# EAGLE board raspi_reprap (EAGLE 6.5.0)
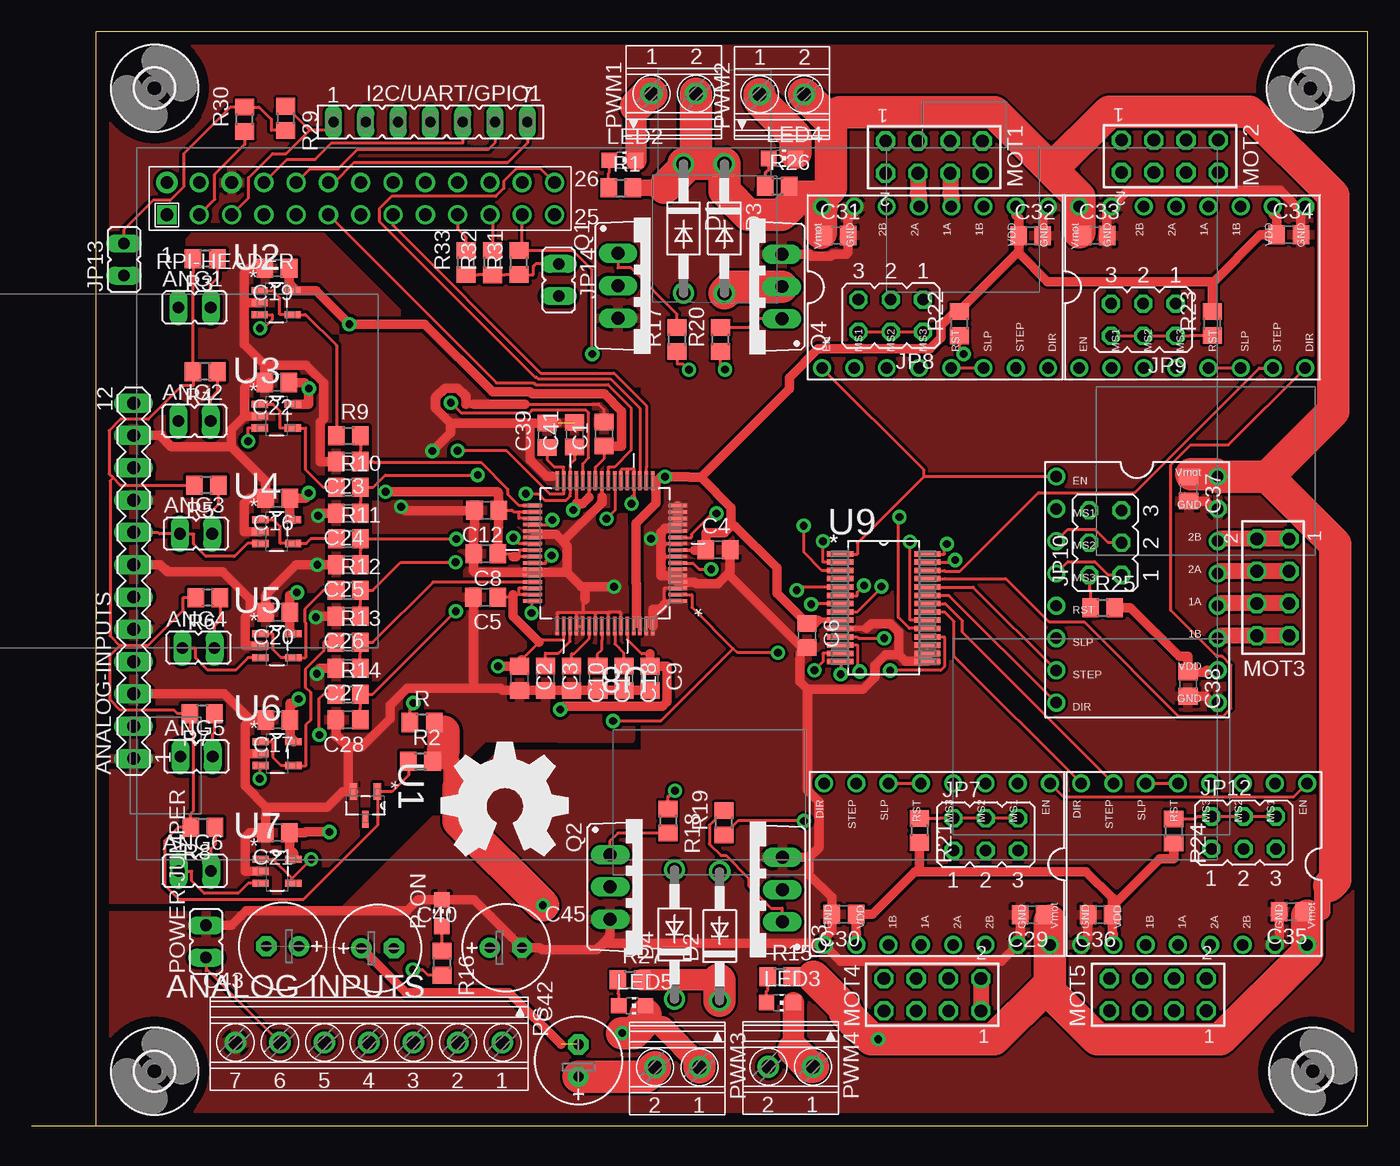
[diagram p0: board, top side]
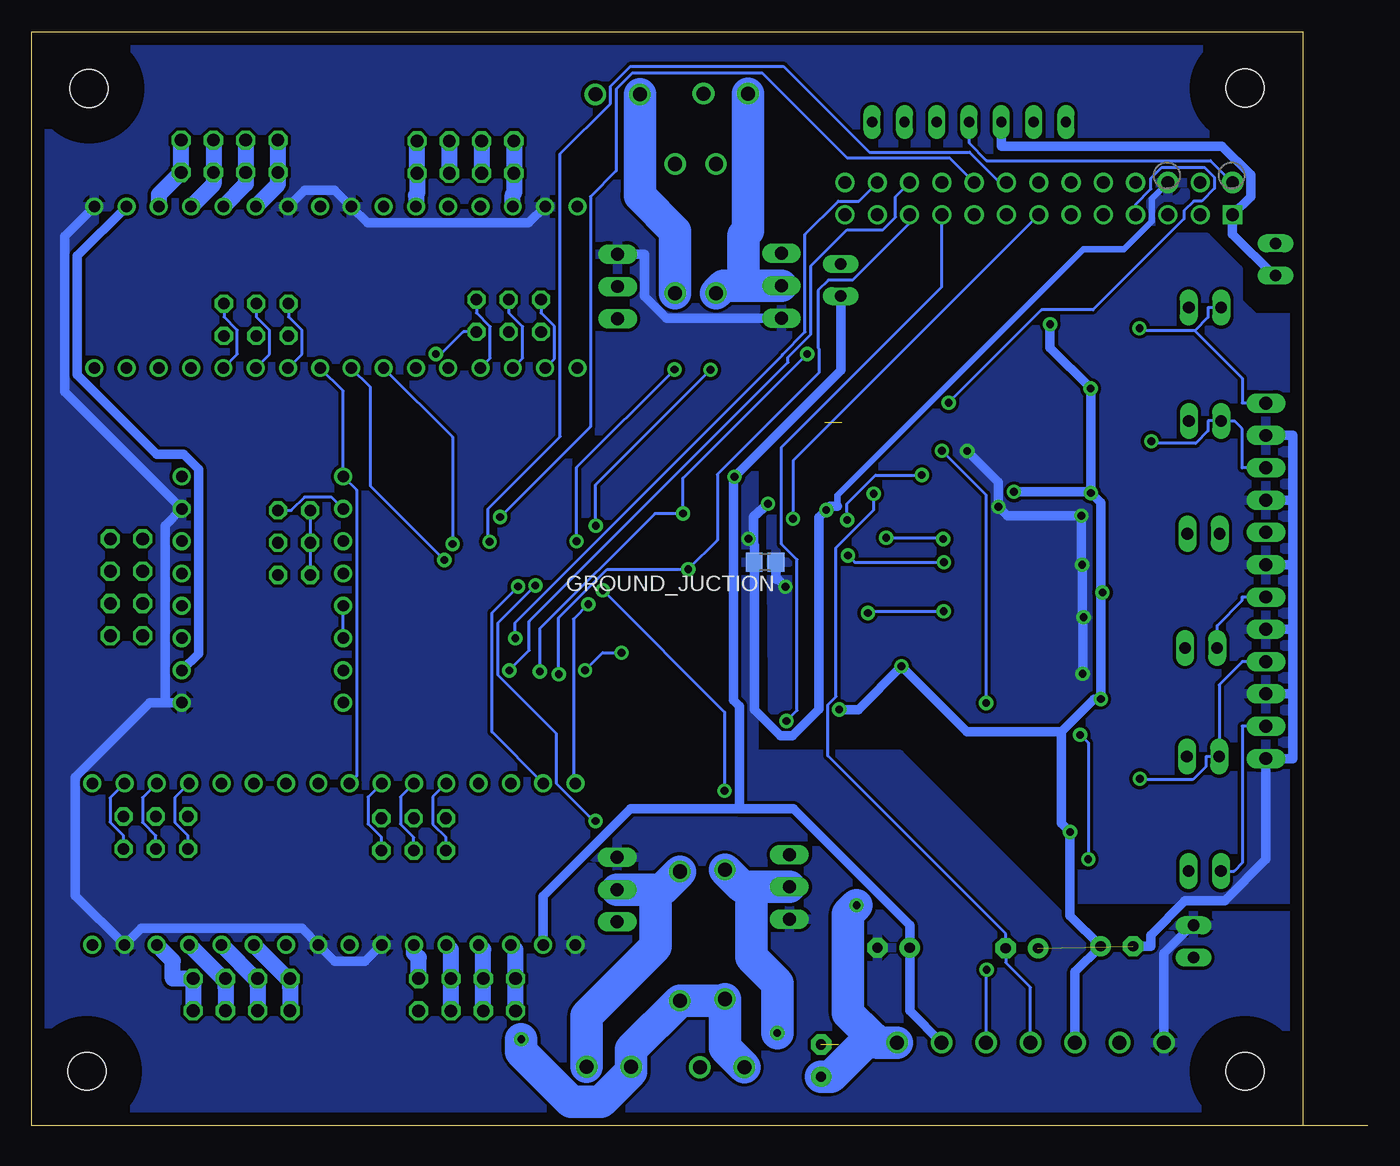
[diagram p1: board, bottom side, seen from below]

Size 105.08 x 86 mm. Coordinates in mm from the lower left corner, seen from the top.
Outline: 4.38,0 5.03,0
Outline: 5.03,0 5.08,0
Outline: 99.95,0 105.03,0
Outline: 105.03,0 105.08,0 105.08,86
Outline: 105.08,86 5.08,86
Outline: 5.08,0 5.08,86
Outline: 5.03,0 5.08,0
Outline: 5.08,0 99.95,0
Outline: 99.95,0 105.03,0
Outline: 105.08,86 5.08,86
Outline: 0,0 99.95,0
Copper layers (1*16): Top 0.035mm / dielectric 1.5mm / Bottom 0.035mm
Design rules "default *": minimum track width 10mil, minimum drill 24mil, track to track 8mil, track to pad 8mil, pad to pad 8mil, via to via 8mil, smd to smd 8mil, copper to edge 40mil, drill to drill 8mil, minimum pad ring 10mil, minimum via ring 10mil, stop-mask expansion 4mil, vias tented up to drill 0mil, thermal gap 10mil

## Footprints (pad centres in the part's own frame; a part is rotated, then mirrored left to right if it is on the bottom)
MA12-1 = drill 1.016 long: 1 -13.97,0; 2 -11.43,0; 3 -8.89,0; 4 -6.35,0; 5 -3.81,0; 6 -1.27,0; 7 1.27,0; 8 3.81,0; 9 6.35,0; 10 8.89,0; 11 11.43,0; 12 13.97,0
JP1 = drill 0.914 long: 1 0,-1.27; 2 0,1.27
C0805 = smd 1.3 x 1.5: 1 -0.95,0; 2 0.95,0
E2,5-7 = drill 0.813 pad 1.6: + -1.27,0 | drill 0.813 pad 1.6 octagon: - 1.27,0
DO41-10 = drill 1.118: A 5.08,0; C -5.08,0
R0805 = smd 1.3 x 1.5: 1 -0.85,0; 2 0.85,0
FE07 = drill 0.813 long: 1 -7.62,0; 2 -5.08,0; 3 -2.54,0; 4 0,0; 5 2.54,0; 6 5.08,0; 7 7.62,0
JP3Q = drill 0.914 octagon: 1 -2.54,-1.27; 2 -2.54,1.27; 3 0,-1.27; 4 0,1.27; 5 2.54,-1.27; 6 2.54,1.27
CHIP-LED0805 = smd 1.2 x 1.2: A 0,-1.05; C 0,1.05
TSW-104-02-S-D = drill 1 pad 1.5 octagon: 1 3.81,-1.27; 2 3.81,1.27; 3 1.27,-1.27; 4 1.27,1.27; 5 -1.27,-1.27; 6 -1.27,1.27; 7 -3.81,-1.27; 8 -3.81,1.27
1751293 = drill 1.1 pad 1.7: 1 -10.5,-0.1; 2 -7,-0.1; 3 -3.5,-0.1; 4 0,-0.1; 5 3.5,-0.1; 6 7,-0.1; 7 10.5,-0.1
1751248 = drill 1.1 pad 1.7: 1 -1.75,-0.1; 2 1.75,-0.1
TO220BV = drill 1.016 long: D 0,-2.54; G -2.54,-2.54; S 2.54,-2.54
R0805' = smd 1.3 x 1.5: 1 -0.95,0; 2 0.95,0
RASPBERRY-PI = drill 1 square: 1 0,0 | drill 1 pad 1.676: 2 0,2.54; 6 5.08,2.54 | drill 1: 3 2.54,0; 4 2.54,2.54; 5 5.08,0; 7 7.62,0; 8 7.62,2.54; 9 10.16,0; 10 10.16,2.54; 11 12.7,0; 12 12.7,2.54; 13 15.24,0; 14 15.24,2.54; 15 17.78,0; 16 17.78,2.54; 17 20.32,0; 18 20.32,2.54; 19 22.86,0; 20 22.86,2.54; 21 25.4,0; 22 25.4,2.54; 23 27.94,0; 24 27.94,2.54; 25 30.48,0; 26 30.48,2.54
SOT95P237X112-3N = smd 1.321 x 0.559: 1 -1.092,0.94; 2 -1.092,-0.94 | smd 1.321 x 0.508: 3 1.092,0
SOT95P280X145-5N = smd 1.27 x 0.559: 1 -1.295,0.94; 2 -1.295,0; 3 -1.295,-0.94; 4 1.295,-0.94; 5 1.295,0.94
QFP50P1200X1200X160-64N = smd 1.473 x 0.279: 1 -5.715,3.759; 2 -5.715,3.251; 3 -5.715,2.743; 4 -5.715,2.261; 5 -5.715,1.753; 6 -5.715,1.245; 7 -5.715,0.762; 8 -5.715,0.254; 9 -5.715,-0.254; 10 -5.715,-0.762; 11 -5.715,-1.245; 12 -5.715,-1.753; 13 -5.715,-2.261; 14 -5.715,-2.743; 15 -5.715,-3.251; 16 -5.715,-3.759; 33 5.715,-3.759; 34 5.715,-3.251; 35 5.715,-2.743; 36 5.715,-2.261; 37 5.715,-1.753; 38 5.715,-1.245; 39 5.715,-0.762; 40 5.715,-0.254; 41 5.715,0.254; 42 5.715,0.762; 43 5.715,1.245; 44 5.715,1.753; 45 5.715,2.261; 46 5.715,2.743; 47 5.715,3.251; 48 5.715,3.759 | smd 0.279 x 1.473: 17 -3.759,-5.715; 18 -3.251,-5.715; 19 -2.743,-5.715; 20 -2.261,-5.715; 21 -1.753,-5.715; 22 -1.245,-5.715; 23 -0.762,-5.715; 24 -0.254,-5.715; 25 0.254,-5.715; 26 0.762,-5.715; 27 1.245,-5.715; 28 1.753,-5.715; 29 2.261,-5.715; 30 2.743,-5.715; 31 3.251,-5.715; 32 3.759,-5.715; 49 3.759,5.715; 50 3.251,5.715; 51 2.743,5.715; 52 2.261,5.715; 53 1.753,5.715; 54 1.245,5.715; 55 0.762,5.715; 56 0.254,5.715; 57 -0.254,5.715; 58 -0.762,5.715; 59 -1.245,5.715; 60 -1.753,5.715; 61 -2.261,5.715; 62 -2.743,5.715; 63 -3.251,5.715; 64 -3.759,5.715
SOP65P780X200-28N = smd 2.057 x 0.432: 1 -3.429,4.216; 2 -3.429,3.581; 3 -3.429,2.921; 4 -3.429,2.286; 5 -3.429,1.626; 6 -3.429,0.965; 7 -3.429,0.33; 8 -3.429,-0.33; 9 -3.429,-0.965; 10 -3.429,-1.626; 11 -3.429,-2.286; 12 -3.429,-2.921; 13 -3.429,-3.581; 14 -3.429,-4.216; 15 3.429,-4.216; 16 3.429,-3.581; 17 3.429,-2.921; 18 3.429,-2.286; 19 3.429,-1.626; 20 3.429,-0.965; 21 3.429,-0.33; 22 3.429,0.33; 23 3.429,0.965; 24 3.429,1.626; 25 3.429,2.286; 26 3.429,2.921; 27 3.429,3.581; 28 3.429,4.216
A4988BREAKOUT = drill 0.9: 1A 8.89,1.27; 1B 11.43,1.27; 2A 6.35,1.27; 2B 3.81,1.27; DIR 16.51,-11.43; EN -1.27,-11.43; GND 16.51,1.27; GND@0 1.27,1.27; MS1 1.27,-11.43; MS2 3.81,-11.43; MS3 6.35,-11.43; RST 8.89,-11.43; SLP 11.43,-11.43; STEP 13.97,-11.43; VDD 13.97,1.27; VMOT -1.27,1.27
3,0 = hole 3: 0,0

## Placement (x,y rotation side)
ANALOG-INPUTS  [MA12-1]  8.01,42.83 90 top
ANG1  [JP1]  12.8,64.32 270 top
ANG2  [JP1]  12.8,55.4 270 top
ANG3  [JP1]  12.92,46.53 270 top
ANG4  [JP1]  13.11,37.56 270 top
ANG5  [JP1]  12.96,29.01 270 top
ANG6  [JP1]  12.82,20.01 270 top
C1  100nF  [C0805]  45.02,54.37 90 top
C2  100nF  [C0805]  38.37,35.16 270 top
C3  470nF  [C0805]  40.41,35.17 270 top
C4  1uF  [C0805]  53.98,45.27 0 top
C5  100nF  [C0805]  35.7,41.54 180 top
C6  100nF  [C0805]  60.97,38.54 270 top
C8  100nF  [C0805]  35.72,44.95 180 top
C9  100nF  [C0805]  48.61,35.16 270 top
C10  10uF  [C0805]  42.46,35.17 270 top
C12  100nF  [C0805]  35.78,48.39 180 top
C15  10uF  [C0805]  44.52,35.17 270 top
C16  100nF  [C0805]  19.35,49.33 180 top
C17  100nF  [C0805]  19.35,31.89 180 top
C18  10uF  [C0805]  46.58,35.17 270 top
C19  100nF  [C0805]  19.29,67.42 180 top
C20  100nF  [C0805]  19.35,40.35 180 top
C21  100nF  [C0805]  19.33,23.04 180 top
C22  100nF  [C0805]  19.28,58.42 180 top
C23  470pF  [C0805]  24.9,52.21 180 top
C24  470pF  [C0805]  24.9,48.15 180 top
C25  470pF  [C0805]  24.9,44.1 180 top
C26  470pF  [C0805]  24.89,40.05 180 top
C27  470pF  [C0805]  24.88,35.97 180 top
C28  470pF  [C0805]  24.89,31.9 180 top
C29  100nF  [C0805]  78.69,16.57 180 top
C30  100nF  [C0805]  63.88,16.61 180 top
C31  100nF  [C0805]  63.26,69.98 0 top
C32  100nF  [C0805]  78.57,69.97 0 top
C33  100nF  [C0805]  83.63,69.98 0 top
C34  100nF  [C0805]  98.87,70.03 0 top
C35  100nF  [C0805]  99.07,16.8 180 top
C36  100nF  [C0805]  84.03,16.57 180 top
C37  100nF  [C0805]  90.99,50.05 270 top
C38  100nF  [C0805]  90.95,34.7 270 top
C39  100nF  [C0805]  40.53,54.28 90 top
C40  [E2,5-7]  27.2,13.94 0 top
C41  100nF  [C0805]  42.7,54.32 90 top
C42  [E2,5-7]  43,5.11 90 top
C43  [E2,5-7]  19.73,14.1 180 top
C45  [E2,5-7]  37.3,13.98 0 top
D1  1N4004  [DO41-10]  51.26,70.53 270 top
D2  1N4004  [DO41-10]  54.1,14.89 90 top
D3  1N4004  [DO41-10]  54.48,70.53 270 top
D4  1N4004  [DO41-10]  50.55,15.03 90 top
GROUND_JUCTION  0  [R0805]  47.39,44.3 180 bottom
I2C/UART/GPIO1  [FE07]  31.36,78.91 0 top
JP7  [JP3Q]  75.04,22.89 0 top
JP8  [JP3Q]  67.56,63.67 180 top
JP9  [JP3Q]  87.43,63.36 180 top
JP10  [JP3Q]  84.44,45.83 90 top
JP12  [JP3Q]  95.32,23.03 0 top
JP13  [JP1]  7.26,68.09 0 top
JP14  [JP1]  41.45,66.48 180 top
LED2  [CHIP-LED0805]  46.47,75.9 270 top
LED3  [CHIP-LED0805]  58.84,9.67 270 top
LED4  [CHIP-LED0805]  59.01,76.05 270 top
LED5  [CHIP-LED0805]  47.22,9.42 270 top
MOT1  TSW-104-02-S-D  [TSW-104-02-S-D]  70.97,76.14 180 top
MOT2  TSW-104-02-S-D  [TSW-104-02-S-D]  89.52,76.21 180 top
MOT3  TSW-104-02-S-D  [TSW-104-02-S-D]  97.63,42.32 90 top
MOT4  TSW-104-02-S-D  [TSW-104-02-S-D]  70.84,10.28 0 top
MOT5  TSW-104-02-S-D  [TSW-104-02-S-D]  88.58,10.29 0 top
P-ON  [CHIP-LED0805]  32.26,16.7 0 top
POWER-JUMPER  [JP1]  13.7,14.48 0 top
PS  1751293  [1751293]  26.52,6.43 180 top
PWM1  +12  [1751248]  50.5,81.23 0 top
PWM2  +12  [1751248]  59,81.18 0 top
PWM3  +12  [1751248]  50.78,4.49 180 top
PWM4  +12  [1751248]  59.68,4.53 180 top
Q1  [TO220BV]  48.65,66.03 270 top
Q2  [TO220BV]  48.03,18.76 270 top
Q3  [TO220BV]  56.49,18.55 90 top
Q4  [TO220BV]  56.45,65.97 90 top
R  0  [R0805']  30.7,31.69 0 top
R1  1k  [R0805']  46.33,73.72 0 top
R2  [R0805']  30.58,28.64 0 top
R3  120k  [R0805']  13.64,68.17 180 top
R4  120k  [R0805']  13.63,59.29 180 top
R5  120k  [R0805']  13.73,50.34 180 top
R6  120k  [R0805']  13.85,41.51 180 top
R7  120k  [R0805']  13.4,32.38 180 top
R8  120k  [R0805']  13.46,23.44 180 top
R9  43  [R0805']  24.91,54.24 0 top
R10  43  [R0805']  24.9,50.18 0 top
R11  43  [R0805']  24.9,46.13 0 top
R12  43  [R0805']  24.89,42.07 0 top
R13  43  [R0805']  24.89,38 0 top
R14  43  [R0805']  24.89,33.92 0 top
R15  1k  [R0805']  58.83,11.7 0 top
R16  [R0805']  32.26,12.77 270 top
R17  1k  [R0805']  50.77,61.8 90 top
R18  1k  [R0805']  50.03,23.95 270 top
R19  1k  [R0805']  54.44,23.81 90 top
R20  1k  [R0805']  54.17,61.81 90 top
R21  1k  [R0805']  69.81,23.2 270 top
R22  1k  [R0805']  72.97,63.05 90 top
R23  1k  [R0805']  92.85,63.05 90 top
R24  1k  [R0805']  89.81,23.16 270 top
R25  1k  [R0805']  84.24,40.73 0 top
R26  1k  [R0805']  58.64,73.85 0 top
R27  1k  [R0805']  47.05,11.47 0 top
R29  1k  [R0805']  19.97,79.2 270 top
R30  1k  [R0805']  16.75,79.13 90 top
R31  1k  [R0805']  38.33,67.85 90 top
R32  1k  [R0805']  36.25,67.84 90 top
R33  1k  [R0805']  34.17,67.85 90 top
RPI-HEADER  RASPBERRY-PI  [RASPBERRY-PI]  10.64,71.61 0 top
U1  LM4040D50IDBZR  [SOT95P237X112-3N]  26.25,25.17 270 top
U2  OPA365AIDBVTG4  [SOT95P280X145-5N]  19.22,64.7 0 top
U3  OPA365AIDBVTG4  [SOT95P280X145-5N]  19.24,55.78 0 top
U4  OPA365AIDBVTG4  [SOT95P280X145-5N]  19.27,46.71 0 top
U5  OPA365AIDBVTG4  [SOT95P280X145-5N]  19.28,37.72 0 top
U6  OPA365AIDBVTG4  [SOT95P280X145-5N]  19.29,29.25 0 top
U7  OPA365AIDBVTG4  [SOT95P280X145-5N]  19.29,20 0 top
U8  ADS8556IPM  [QFP50P1200X1200X160-64N]  45.1,44.99 180 top
U9  MCP23S17-E/SS  [SOP65P780X200-28N]  67.01,40.71 0 top
U$2  A4983CARRIER  [A4988BREAKOUT]  78.82,15.48 180 top
U$3  A4983CARRIER  [A4988BREAKOUT]  63.44,70.99 0 top
U$4  A4983CARRIER  [A4988BREAKOUT]  83.66,70.99 0 top
U$5  A4983CARRIER  [A4988BREAKOUT]  99.05,15.48 180 top
U$6  A4983CARRIER  [A4988BREAKOUT]  92.01,49.76 270 top
U$7  [3,0]  9.66,81.57 0 top
U$8  [3,0]  100.57,81.54 0 top
U$9  [3,0]  100.75,4.27 0 top
U$10  [3,0]  9.66,4.27 0 top
U$11  [OSHW_FILLX350_NOTEXT]  32.25,21.24 0 top

## Library data of the parts
ANALOG-INPUTS = con-lstb; OC_FARNELL: unknown; OC_NEWARK: unknown
ANG1-ANG6 JP7-JP10 JP12-JP14 POWER-JUMPER = jumper
C1-C6 C8-C10 C12 C15-C43 C45 R R1-R27 R29-R33 = rcl
D1-D4 = diode
GROUND_JUCTION = resistor
I2C/UART/GPIO1 = con-lsta; OC_FARNELL: unknown; OC_NEWARK: unknown
LED2-LED5 P-ON = led
MOT1-MOT5 = con-samtec; OC_FARNELL: unknown; OC_NEWARK: unknown
PS PWM1-PWM4 = con-phoenix-350; OC_FARNELL: unknown; OC_NEWARK: unknown
Q1-Q4 = transistor-power
RPI-HEADER = RaspberryPi
U1 = shuntreference; MPN: LM4040D50IDBZR; OC_FARNELL: 1652239; OC_NEWARK: 43K3367; PACKAGE: 3-SOT-23; SUPPLIER: TEXAS INSTRUMENTS
U2-U7 = amp2; MPN: OPA365AIDBVTG4; OC_FARNELL: 1276091; OC_NEWARK: -; PACKAGE: SOT-23-5; SUPPLIER: TEXAS INSTRUMENTS
U8 = ADC; MPN: ADS8556IPM; OC_FARNELL: 1762983; OC_NEWARK: 26R5213; PACKAGE: QFP-64; SUPPLIER: TEXAS INSTRUMENTS
U9 = mcspi; MPN: MCP23S17-E/SS; OC_FARNELL: 1467675; OC_NEWARK: 31K2952; PACKAGE: SSOP-28; SUPPLIER: Microchip
U$2-U$6 = RepRapjr
U$7-U$10 = holes
U$11 = ohw-logo

## Nets
5VREF: R2.1 R3.2 R4.2 R5.2 R6.2 R7.2 R8.2 U1.1
+3.3V: I2C/UART/GPIO1.3 JP13.1 RPI-HEADER.1
+3V: C4.1 C6.1 C30.1 C32.1 C34.1 C36.1 C38.1 C45.+ JP14.2 PS.2 R21.2 R22.2 R23.2 R24.2 R25.2 U8.9 U8.17 U8.61 U8.62 U9.9 U$2.VDD U$3.VDD U$4.VDD U$5.VDD U$6.VDD
+5V: C1.1 C2.1 C5.1 C8.1 C9.1 C12.1 C16.1 C17.1 C19.1 C20.1 C21.1 C22.1 C43.+ PS.5 U2.5 U3.5 U4.5 U5.5 U6.5 U7.5 U8.26 U8.34 U8.35 U8.40 U8.41 U8.46 U8.47 U8.50 U8.60
+12IC: C39.1 R.1 U8.31
+12V: C29.1 C31.1 C33.1 C35.1 C37.1 C42.+ D1.C D2.C D3.C D4.C PS.1 PWM1.2 PWM2.2 PWM3.2 PWM4.2 R1.2 R2.2 R15.2 R26.2 R27.2 R.2 U$2.VMOT U$3.VMOT U$4.VMOT U$5.VMOT U$6.VMOT
-12V: C40.- C41.1 PS.4 U8.30
AGND: ANALOG-INPUTS.1 ANALOG-INPUTS.3 ANALOG-INPUTS.5 ANALOG-INPUTS.7 ANALOG-INPUTS.9 ANALOG-INPUTS.11 C1.2 C2.2 C3.2 C5.2 C8.2 C9.2 C10.2 C12.2 C15.2 C16.2 C17.2 C18.2 C19.2 C20.2 C21.2 C22.2 C23.2 C24.2 C25.2 C26.2 C27.2 C28.2 C39.2 C40.+ C41.2 C42.- C43.- GROUND_JUCTION.1 U1.2 U2.2 U3.2 U4.2 U5.2 U6.2 U7.2 U8.25 U8.32 U8.37 U8.38 U8.43 U8.44 U8.49 U8.52 U8.53 U8.55 U8.57 U8.59
CE1: RPI-HEADER.24 U9.11
CE2: RPI-HEADER.26 U8.19
CLK: R31.2 RPI-HEADER.23 U8.11 U9.12
ENAMOT: U9.1 U$2.EN U$3.EN U$4.EN U$5.EN U$6.EN
GND: C4.2 C6.2 C29.2 C30.2 C31.2 C32.2 C33.2 C34.2 C35.2 C36.2 C37.2 C38.2 C45.- GROUND_JUCTION.2 P-ON.C POWER-JUMPER.2 PS.7 Q1.S Q2.S Q3.S Q4.S RPI-HEADER.6 U8.1 U8.3 U8.4 U8.5 U8.6 U8.8 U8.10 U8.12 U8.13 U8.14 U8.15 U8.16 U8.20 U8.21 U8.22 U8.27 U8.29 U8.63 U8.64 U9.10 U9.15 U9.16 U9.17 U$2.GND U$2.GND@0 U$3.GND U$3.GND@0 U$4.GND U$4.GND@0 U$5.GND U$5.GND@0 U$6.GND U$6.GND@0
GPIO1: I2C/UART/GPIO1.7 RPI-HEADER.12
M1-MOT2: MOT4.3 MOT4.4 U$2.2A
M1-MOT3: MOT4.5 MOT4.6 U$2.1A
M1-MOT4: MOT4.7 MOT4.8 U$2.1B
M2-MOT1: MOT1.1 MOT1.2 U$3.2B
M2-MOT2: MOT1.3 MOT1.4 U$3.2A
M2-MOT3: MOT1.5 MOT1.6 U$3.1A
M2-MOT4: MOT1.7 MOT1.8 U$3.1B
M3-MOT1: MOT2.1 MOT2.2 U$4.2B
M3-MOT2: MOT2.3 MOT2.4 U$4.2A
M3-MOT3: MOT2.5 MOT2.6 U$4.1A
M3-MOT4: MOT2.7 MOT2.8 U$4.1B
M4-MOT1: MOT5.1 MOT5.2 U$5.2B
M4-MOT2: MOT5.3 MOT5.4 U$5.2A
M4-MOT3: MOT5.5 MOT5.6 U$5.1A
M4-MOT4: MOT5.7 MOT5.8 U$5.1B
M5-MOT1: MOT3.1 MOT3.2 U$6.2B
M5-MOT2: MOT3.3 MOT3.4 U$6.2A
M5-MOT3: MOT3.5 MOT3.6 U$6.1A
M5-MOT4: MOT3.7 MOT3.8 U$6.1B
MISO: R32.2 RPI-HEADER.21 U8.7 U9.14
MOSI: R33.2 RPI-HEADER.19 U8.2 U9.13
MOT4: MOT4.1 MOT4.2 U$2.2B
N$1: C25.1 R11.2 U8.39
N$2: ANALOG-INPUTS.8 ANG3.1 U4.3
N$3: R11.1 U4.1 U4.4
N$4: ANG3.2 R5.1
N$5: Q2.G R18.2
N$6: C26.1 R12.2 U8.42
N$7: RPI-HEADER.15 U8.18
N$8: JP7.3 U$2.MS2
N$9: U9.21 U$5.DIR
N$10: P-ON.A R16.1
N$11: JP7.1 U$2.MS3
N$12: Q1.G R17.2
N$13: ANALOG-INPUTS.6 ANG4.1 U5.3
N$14: ANALOG-INPUTS.12 ANG1.1 U2.3
N$15: R9.1 U2.1 U2.4
N$16: C23.1 R9.2 U8.33
N$17: R12.1 U5.1 U5.4
N$18: ANG1.2 R3.1
N$19: ANG4.2 R6.1
N$20: RPI-HEADER.22 U9.18
N$21: RPI-HEADER.13 U8.23
N$22: RPI-HEADER.18 U9.19
N$23: C28.1 R14.2 U8.48
N$24: C24.1 R10.2 U8.36
N$25: JP12.5 U$5.MS1
N$26: Q3.G R19.2
N$27: JP10.5 U$6.MS1
N$28: JP9.5 U$4.MS1
N$29: JP8.2 JP8.4 JP8.6 R22.1
N$30: JP7.2 JP7.4 JP7.6 R21.1
N$31: JP12.3 U$5.MS2
N$32: JP12.1 U$5.MS3
N$33: U9.22 U$5.STEP
N$34: R20.1 U9.2
N$35: U$2.RST U$2.SLP
N$36: RPI-HEADER.16 U9.20
N$37: R17.1 U9.3
N$38: R18.1 U9.5
N$39: JP8.5 U$3.MS1
N$40: RPI-HEADER.7 U8.28
N$41: JP8.3 U$3.MS2
N$42: JP8.1 U$3.MS3
N$43: JP9.3 U$4.MS2
N$44: U9.23 U$6.DIR
N$45: U9.24 U$6.STEP
N$46: U$3.RST U$3.SLP
N$47: Q4.G R20.2
N$48: JP9.1 U$4.MS3
N$49: JP10.3 U$6.MS2
N$50: JP10.1 U$6.MS3
N$51: JP7.5 U$2.MS1
N$52: LED2.A R1.1
N$53: LED5.A R27.1
N$54: JP9.2 JP9.4 JP9.6 R23.1
N$55: JP13.2 R29.2 R30.2
N$56: LED3.A R15.1
N$57: U9.25 U$4.DIR
N$58: U9.26 U$4.STEP
N$59: U$4.RST U$4.SLP
N$60: I2C/UART/GPIO1.6 RPI-HEADER.10
N$61: LED4.A R26.1
N$62: I2C/UART/GPIO1.5 RPI-HEADER.8
N$63: I2C/UART/GPIO1.4 RPI-HEADER.2
N$64: R30.1 RPI-HEADER.3
N$65: I2C/UART/GPIO1.1 R29.1 RPI-HEADER.5
N$67: JP12.2 JP12.4 JP12.6 R24.1
N$70: U9.27 U$3.DIR
N$71: U9.28 U$3.STEP
N$72: U$5.RST U$5.SLP
N$73: ANALOG-INPUTS.10 ANG2.1 U3.3
N$77: JP14.1 R31.1 R32.1 R33.1
N$80: R10.1 U3.1 U3.4
N$82: ANG2.2 R4.1
N$84: R19.1 U9.6
N$85: C27.1 R13.2 U8.45
N$86: ANALOG-INPUTS.4 ANG5.1 U6.3
N$87: U9.7 U$2.DIR
N$88: U9.8 U$2.STEP
N$89: JP10.2 JP10.4 JP10.6 R25.1
N$94: U$6.RST U$6.SLP
N$95: R13.1 U6.1 U6.4
N$96: ANG5.2 R7.1
N$104: ANALOG-INPUTS.2 ANG6.1 U7.3
N$106: R14.1 U7.1 U7.4
N$107: ANG6.2 R8.1
N$109: RPI-HEADER.11 U8.24
POK: PS.3 R16.2
PON: POWER-JUMPER.1 PS.6
PWM1: D4.A LED5.C PWM3.1 Q2.D
PWM2: D1.A LED2.C PWM1.1 Q1.D
PWM3: D2.A LED3.C PWM4.1 Q3.D
PWM4: D3.A LED4.C PWM2.1 Q4.D
REFC_A: C10.1 U8.54
REFC_B: C15.1 U8.56
REFC_C: C18.1 U8.58
REFIO: C3.1 U8.51

## Tracks (layer width: path | path; a pad name or v marks a point on that pad's centre or on a via)
5VREF
  Top 0.254: 6.92,37.73 6.96,37.78 9.17,37.78 11.92,40.53 11.92,41.51 R6.2 | 6.92,37.73 6.16,36.97 6.16,33.47 6.96,32.67 11.19,32.67 11.47,32.38 R7.2 12.45,31.3 12.73,31.02 12.73,24.74 12.51,24.52 R8.2 11.53,23.44 10.49,22.4 10.49,18.86 11.58,17.77 21.36,17.77 27.19,23.6 U1.1 28.34,26.27 29.63,27.55 R2.1 | 6.38,50.92 6.16,50.69 6.16,38.49 6.92,37.73 | 6.38,50.92 6.08,51.22 6.08,54.65 6.96,55.53 9.17,55.53 11.8,58.16 12.68,58.16 R4.2 12.68,67.03 12.69,67.04 R3.2 | 6.38,50.92 6.88,50.42 6.96,50.34 R5.2
+3.3V
  Bottom 0.762: JP13.1 7.36,66.82 10.64,70.1 RPI-HEADER.1 9.2,73.04 9.2,74.75 11.46,77 28.82,77 I2C/UART/GPIO1.3
+3V  (via drill 0.61 pad 1.12)
  Top 0.254: U8.61 U8.62
  Top 0.279: U8.17 49.09,50.7 49.17,50.7 | 47.57,39.54 U8.62 | 52.13,45.24 U8.9
  Top 0.432: U9.9 62.13,39.75 62.12,39.73 61.83,39.73
  Top 0.762: 52.62,50.97 59.58,57.93 59.58,58.82 61.85,61.08 70.66,61.08 71.5,61.92 71.5,62.87 72.7,64.07 72.97,64.07 | 52.62,50.97 51.72,50.97 51.67,51.02 v49.8,51.02 49.48,51.02 49.17,50.7 | 52.62,50.97 | 55,47.14 55,48.59 52.62,50.97 | 55,47.14 54.47,46.61 53.03,46.61 C4.1 53,45.24 52.13,45.24 | 55,47.14 55.33,47.14 58.62,43.85 58.62,41.84 C6.1 61.59,39.49 61.83,39.73 | R24.2 89.81,20.97 88.72,20.97 84.98,17.23 | 84.98,17.23 84.98,17.9 82.92,19.96 69.81,19.96 | 84.98,17.23 C36.1 84.98,15.18 85.08,15.08 U$5.VDD | 69.81,19.96 69.81,20.97 R21.2 | 69.81,19.96 69.47,19.96 66.12,16.61 C30.1 64.83,15.22 64.86,15.2 U$2.VDD | 92.85,66.36 79.9,66.36 77.62,68.63 | 92.85,66.36 92.96,66.36 96.64,70.03 C34.1 97.92,71.42 97.63,71.71 U$4.VDD | 92.85,66.36 92.85,65.29 R23.2 | 77.62,68.63 C32.1 77.62,71.35 77.41,71.57 U$3.VDD | 72.97,64.07 77.53,68.63 77.62,68.63 | R22.2 72.97,64.07 | R25.2 86.42,40.73 90.26,36.89 90.95,36.89 C38.1 92.28,35.65 92.42,35.79 U$6.VDD | 49.09,50.7 49.09,48.94 47.51,47.36 47.51,42.67 47.57,42.62 47.57,39.54
  Bottom 0.762: U$4.VDD 101.49,68.39 101.49,59.03 95.24,52.78 93.14,52.78 91.96,51.6 91.96,37.11 U$6.VDD | 49.42,24.91 45.18,24.91 36.03,15.76 C45.+ 36.03,9.04 PS.2 | 49.42,24.91 57.97,24.91 64.86,18.02 U$2.VDD | 49.42,24.91 49.42,32.98 49.88,33.44 49.88,50.94 v49.8,51.02 41.45,59.37 JP14.2
+5V  (via drill 0.61 pad 1.12)
  Top 0.254: 48.61,36.49 48.61,36.99 | 38.51,36.62 39.91,38.01 40.1,38.21 41.84,38.21 U8.50 | 37.86,41.54 C5.1 | C9.1 48.61,36.38 | 45.23,53.42 C1.1 45.02,52.44 44.35,51.77 44.33,51.77 U8.26 | U8.60 46.85,38.21 47.96,37.09 48.61,37.09 | 38.31,48.24 37.91,48.24 37.76,48.39 C12.1 | U8.34 38.31,48.24 | 38.31,48.24 38.31,47.73 U8.35 | 38.31,44.74 38.09,44.74 | U8.41 38.31,44.74 | 38.31,44.74 38.31,45.24 U8.40 | U8.46 38.31,42.25 38.31,41.74 | C8.1 37.7,44.95 37.7,44.9 37.86,44.74 | U8.47 38.31,41.74 | 38.31,41.74 37.86,41.74 | 38.01,44.74 37.94,44.74
  Top 0.762: C9.1 49.95,36.12 49.95,33.31 49.62,32.98 41.84,32.98 v41.57,32.71 | v36.67,36.1 36.68,36.12 C2.1 38.37,36.48 38.51,36.62 | v23.41,23.08 21.55,23.08 21.51,23.04 C21.1 20.28,21.7 20.58,21.4 U7.5 | v27.82,49.83 36.63,49.83 36.73,49.72 C12.1 36.73,47.05 36.67,46.99 C8.1 | 39.91,38.01 37.86,40.05 37.86,41.54 37.86,41.74 | U3.5 21.76,56.72 21.76,57.92 v21.79,57.96 21.46,58.29 21.46,58.42 C22.1 | v20.86,41.92 20.63,41.69 20.3,41.69 C20.1 20.3,38.94 U5.5 | 48.61,36.49 48.61,36.38 | C19.1 20.24,66.09 20.39,66.09 20.83,65.64 | U2.5 20.83,65.64 | 20.83,65.64 20.91,65.64 21.73,65.64 22.35,65.64 v24.98,63.01 30.91,63.01 36.24,57.68 39.2,57.68 39.35,57.54 45.03,57.54 46.4,56.17 46.4,53.42 45.23,53.42 | v21.78,49.74 21.53,49.49 21.53,49.33 C16.1 20.3,47.92 U4.5 | U6.5 20.58,30.27 20.3,30.55 C17.1 20.3,33.22 20.69,33.22 v21,33.53 | 38.09,44.74 38.01,44.74 | 48.61,36.99 48.61,37.09 | 37.94,44.74 37.86,44.74
  Bottom 0.762: v41.57,32.71 40.06,32.71 v36.67,36.1 31.51,30.95 24.11,30.95 | 24.11,30.95 21.53,33.53 v21,33.53 21,41.92 | 24.11,30.95 24.11,23.78 v23.41,23.08 23.41,16.51 C43.+ 23.02,12.08 PS.5 | 21.79,49.83 v27.82,49.83 | 21.79,49.83 21.78,49.82 v21.78,49.74 21,48.96 21,41.92 | 21.79,49.83 v21.79,57.96 24.98,61.15 v24.98,63.01 | 21,41.92 v20.86,41.92
+12IC  (via drill 0.61 pad 1.12)
  Top 0.254: R.1 29.75,32.95 v30.02,33.22 | v33.49,53.06 37.35,53.06 40.77,49.64 41.84,49.64 U8.31 41.84,50.73 41.84,51.77 41.11,51.77 40.53,52.35 C39.1
  Bottom 0.254: v33.49,53.06 30.02,49.58 v30.02,33.22
+12V  (via drill 0.61 pad 1.12)
  Top 1.3: 102.06,18.84 101.52,18.3 101.52,16.8 C35.1 100.32,16.5 | 62.09,70.21 C31.1 | 60.4,73.05 R26.2 | 80.09,16.12 C29.1 | 91.21,51.23 C37.1 | 33.57,26.59 33.03,27.13 33.03,28.64 R2.2 32.36,29.47 | 32.39,30.95 R.2 | 49.77,73.72 R1.2 | 61.49,11.7 R15.2 | 82.41,70.25 C33.1
  Top 1.408: 62.16,72.65 U$3.VMOT
  Top 1.676: R27.2 54.03,11.47
  Top 2.54: 80.21,75.18 82.39,73 U$4.VMOT 82.41,72.24 82.41,70.25 | 62.87,78.97 63.58,79.68 75.71,79.68 80.21,75.18 | 97.21,51.03 102.36,56.18 102.36,73.15 95.78,79.73 84.76,79.73 80.21,75.18 | 97.21,51.03 102.53,45.71 102.53,19.31 102.06,18.84 | 97.21,51.03 U$6.VMOT 93.08,51.23 91.21,51.23 | 62.87,78.97 PWM2.2 | 62.16,73.05 62.87,73.75 62.87,78.97 | U$3.VMOT 62.09,72.19 62.09,70.21 | 62.16,72.65 62.16,73.05 | 62.16,73.05 60.4,73.05 58.97,71.62 56.34,71.62 54.48,73.48 D3.C 52.24,75.61 | 52.24,75.61 D1.C | 52.24,75.61 PWM1.2 | 80.09,16.12 U$2.VMOT 80.09,11.19 79.75,10.85 | 79.75,10.85 75.68,6.78 v66.58,6.78 66.05,6.78 63.96,8.87 63.96,9.23 61.49,11.7 | v40.2,17.31 33.57,23.95 33.57,26.59 | 32.39,30.95 32.39,29.5 32.36,29.47 | 79.75,10.85 83.81,6.78 93.5,6.78 100.32,13.6 U$5.VMOT 100.32,16.5 | D1.C | D1.C 51.27,75.21 49.77,73.72 | D2.C 54.1,11.39 54.03,11.47 | C42.+ 48.28,3.84 PWM3.2
  Bottom 2.54: v66.58,6.78 66.58,5.81 62.65,1.88 60.29,1.88 57.93,4.24 PWM4.2 57.93,5.98 D2.C 50.55,9.81 | 50.55,9.81 D4.C | PWM3.2 50.55,6.11 50.55,9.81 | 39.05,7.02 40.86,8.84 40.86,16.65 v40.2,17.31 | PS.1 38.55,6.53 39.05,7.02 | C42.+ 42.23,3.84 39.05,7.02
-12V  (via drill 0.61 pad 1.12)
  Top 0.254: v38.85,49.67 39.85,49.67 40.35,49.18 42.03,49.18 42.35,49.5 42.35,49.64 U8.30 42.35,51.99 42.7,52.34 C41.1
  Bottom 0.254: 41.82,33.72 42.46,33.08 42.46,29.06 28.47,15.07 C40.- 28.47,12.81 26.52,10.86 PS.4 | 41.82,33.72 | 41.82,33.72 41.82,45.45 38.85,48.41 v38.85,49.67
AGND  (via drill 0.61 pad 1.12)  (3 unrouted)
  Top 0.254: 34.15,56.72 34.76,56.72 | 38.8,56.72 44.59,56.72 45.02,56.3 C1.2 | U8.59 46.34,40.34 45.35,40.34 | U8.49 41.34,40.34 42.84,40.34 | U8.55 44.33,40.34 | 44.33,40.34 45.35,40.34 | 42.84,40.34 U8.52 U8.53 | U8.57 45.35,40.34 | 43.34,40.34 43.5,40.34 44.33,40.34 | 43.5,41.36 43.34,41.2 43.34,40.34 | 42.84,40.34 43.34,40.34
  Top 0.279: 44.84,49.38 U8.25 | 40.98,51.06 U8.32 | U8.37 39.62,46.5 39.62,46.48 U8.38 | U8.44 39.38,43.26 39.62,43.5 U8.43 39.14,43.5
  Top 0.762: 34.75,34.38 36.87,34.38 37.04,34.22 C2.2 39.75,34.22 39.76,34.22 C3.2 41.79,34.22 C10.2 43.85,34.22 C15.2 45.91,34.22 C18.2 47.96,34.22 C9.2 | 24.87,29.77 25.95,29.77 28.19,32 28.19,33.06 29.51,34.38 34.75,34.38 | 34.75,34.38 34.75,40.2 C5.2 | 24.87,29.77 24.87,26.27 | 24.87,29.77 24.07,30.57 23.94,30.57 C28.2 | 32.94,55.23 39.2,55.23 | 34.15,56.72 34.15,57.33 33.5,57.98 32.49,57.98 31.77,57.26 31.77,56.4 32.94,55.23 | v31.5,53.03 32.94,54.47 32.94,55.23 | C19.2 17.11,67.42 16.7,67.02 16.7,64.7 | 16.7,64.7 16.95,64.7 U2.2 | 18.35,59.78 16.7,61.42 16.7,64.7 | 18.35,59.78 18.33,59.76 C22.2 17.09,58.42 16.73,58.06 16.73,55.78 | 18.35,59.78 21.59,59.78 22.96,58.41 22.96,55.58 22.67,55.29 22.67,52.21 C23.2 | 39.62,46.48 41.24,46.48 41.79,45.93 | 41.79,45.93 44.84,48.98 44.84,49.38 | 42.12,43.51 42.12,45.6 41.79,45.93 | 39.2,55.23 39.2,52.37 40.51,51.06 40.98,51.06 | 39.2,55.23 C39.2 41.33,55.23 41.37,55.27 | 34.83,48.35 29.35,48.35 v29.06,48.65 | 42.12,43.51 42.11,43.5 39.62,43.5 | 42.12,43.51 43.25,42.37 43.5,42.37 | 38.8,56.72 34.76,56.72 | ANALOG-INPUTS.7 10.12,44.1 10.68,43.54 15.03,43.54 17.17,41.4 17.17,40.35 | 43.5,42.37 v45.8,42.37 | 43.5,41.36 43.5,42.37 | 39.14,43.5 34.88,43.5 34.77,43.62 C8.2 34.77,46.99 34.83,47.05 34.83,48.35 | 24.87,26.27 24.44,26.27 23.22,25.04 18.44,25.04 | U1.2 24.87,26.27 | 15.67,53.39 15.67,54.73 16.73,55.78 | 15.67,53.39 18.39,50.67 C16.2 17.11,49.33 16.71,48.93 16.71,46.71 U4.2 | 15.67,53.39 10.97,53.39 10.17,54.19 10.17,54.26 ANALOG-INPUTS.11 | U3.2 16.73,55.78 | C12.2 34.83,48.35 | v22.52,47.95 22.72,48.15 C24.2 | C25.2 22.71,44.1 v22.46,44.1 20.81,44.1 18.4,41.69 C20.2 17.17,40.35
  Top 0.762: 18.44,25.04 16.77,26.71 16.77,29.25 | 18.44,25.04 18.44,24.43 18.38,24.37 C21.2 17.14,23.04 16.77,22.67 16.77,20 U7.2 | C26.2 22.7,40.05 22.63,39.98 v22.35,39.98 | v22.42,35.53 22.7,35.81 22.7,35.97 C27.2 | 16.77,29.25 16.77,31.49 17.17,31.89 | U6.2 16.77,29.25 | U5.2 16.76,37.72 16.76,39.95 17.17,40.35 | ANALOG-INPUTS.3 15.12,33.94 17.17,31.89 | C17.2 17.17,31.89 | 41.61,6.38 37.55,10.44 29.44,10.44 C40.+
  Bottom 0.762: v31.5,53.03 29.06,50.59 v29.06,48.65 28.36,47.95 v22.52,47.95 22.52,44.16 v22.46,44.1 22.46,40.08 v22.35,39.98 22.42,39.9 v22.42,35.53 | 5.9,33.94 5.9,28.86 ANALOG-INPUTS.1 8.01,20.93 11.25,17.69 14.37,17.69 17.08,14.98 17.08,14.1 C43.- | 5.9,33.94 6.14,33.94 ANALOG-INPUTS.3 | 5.9,33.94 5.9,39.02 | ANALOG-INPUTS.5 5.9,39.02 | 5.9,44.1 5.9,39.02 | 5.9,44.1 6.14,44.1 ANALOG-INPUTS.7 | 5.9,44.1 5.9,49.18 | v45.8,42.37 46.38,42.96 46.54,42.96 GROUND_JUCTION.1 | ANALOG-INPUTS.11 5.9,54.26 5.9,49.18 | ANALOG-INPUTS.9 5.9,49.18
  pour Top (isolate 0.254): 5.08,63.5 8.89,63.5 10.16,64.77 10.16,67.31 12.7,69.85 22.86,69.85 35.56,57.15 46.99,57.15 47.03,55.63 47.11,30.4 35.56,30.48 22.86,17.78 5.08,17.78
  pour Bottom (isolate 0.254): 5.08,63.5 8.89,63.5 10.16,64.77 10.16,67.31 12.7,69.85 22.86,69.85 35.56,57.15 46.99,57.15 47.03,55.63 46.78,30.48 35.56,30.48 22.86,17.78 5.08,17.78
CE1  (via drill 0.61 pad 1.12)
  Top 0.254: U9.11 64.94,38.42 65.05,38.31 v67.05,38.31
  Bottom 0.254: v67.05,38.31 67.05,39.55 46.05,60.55 46.05,60.61 44.26,62.4 44.26,70.07 41.63,72.69 40.03,72.69 RPI-HEADER.24
CE2
  Top 0.254: RPI-HEADER.26 40.03,75.23 38.09,75.23 37.12,74.26 37.12,73.7 36.48,73.06 28.29,73.06 27.33,72.11 27.33,71.11 39.59,58.85 39.68,58.85 39.83,58.71 45.52,58.71 47.84,56.39 U8.19
CLK  (via drill 0.61 pad 1.12)
  Top 0.254: 38.58,68.8 R31.2 | v44.08,60.67 44.08,67.3 42.58,68.8 38.58,68.8 | 38.58,68.8 RPI-HEADER.23 | U9.12 64.94,37.79 64.94,35.89 v65.12,35.7 | U8.11 51.88,46.23 51.88,46.48 53.52,48.12 v53.86,48.12
  Bottom 0.254: v44.08,60.67 53.86,50.9 v53.86,48.12 56.08,48.12 65.12,39.07 v65.12,35.7
ENAMOT
  Top 0.254: 70.18,51.03 64.94,45.79 64.94,44.93 U9.1 | U$6.EN 70.18,51.03 | 70.18,51.03 70.18,51.55 U$3.EN | U$2.EN 81.15,25.85 99.26,25.85 U$5.EN
  Bottom 0.254: U$2.EN 79.53,27.47 79.53,49.98 U$6.EN 80.58,57.76 U$4.EN
GND  (via drill 0.61 pad 1.12)
  Top 0.254: U8.13 50.59,47.03 50.59,46.96 | U8.3 49.74,42.25 49.74,41.35 | U8.1 49.74,41.23 | 70.44,36.81 U9.16 U9.17 | U8.22 46.35,50.72 46.35,51.56 46.42,51.63 46.86,51.63 | 46.86,51.63 46.85,51.61 U8.21 | U8.21 46.86,50.72 | 46.86,50.72 46.86,51.63 | 46.86,51.63 47.37,51.63 | 47.37,51.63 47.37,50.1 47.37,49.47 47.18,49.27 v47.18,48.89 | U8.21 46.86,50.72 | 46.86,50.72 46.86,51.63 | 46.86,51.63 47.37,51.63 | 47.37,51.63 47.36,51.61 U8.20
  Top 0.279: 42.84,48.93 U8.29 | 49.49,44.74 U8.8 | 49.49,45.75 49.73,45.75 U8.10 | 50.59,46.96 U8.12 | 50.81,43.5 U8.6 | 51.27,42.7 U8.3 | 48.8,39.73 U8.63 | U8.27 43.85,49.63 43.84,49.61 43.84,49.38 | 49.74,41.35 49.74,41.23 49.74,40.97
  Top 0.432: 65.66,39.09 U9.10
  Top 0.508: 47.27,49.36 v47.18,48.89
  Top 0.762: POWER-JUMPER.2 15.71,15.75 16.41,16.45 16.86,16.89 24.32,16.89 29.53,16.89 30.39,17.75 P-ON.C 34.8,17.75 36.13,16.42 C45.- 39.95,13.98 40.13,13.8 44.42,13.8 44.95,14.34 | 68.19,37.01 67.13,37.01 66.31,36.19 66.31,35.23 65.37,34.29 61.02,34.29 | 68.19,37.01 68.19,38.79 67.52,39.46 66.03,39.46 65.66,39.09 | 68.19,37.01 68.7,36.49 68.78,36.49 U9.15 70.44,36.81 | 60.74,37.42 60.41,37.09 60.41,34.89 61.02,34.29 | 42.88,48.88 43.33,48.88 43.84,49.38 | 42.84,48.93 42.88,48.88 | v42.58,48.4 42.88,48.7 42.88,48.88 | 61.02,34.29 61.02,26.37 61.91,25.48 61.91,21.85 61.14,21.09 | 62.31,14.34 62.31,14.65 62.93,15.27 C30.2 62.93,17.94 61.14,19.73 61.14,21.09 | 62.31,14.34 U$2.GND 63.61,12.91 76.26,12.91 U$2.GND@0 77.74,14.39 C29.2 | 44.95,14.34 62.31,14.34 | 44.95,14.34 45.49,14.88 Q2.S | 99.82,71.92 C34.2 | U$4.GND 99.82,71.92 | 99.82,71.92 98.19,73.55 86.22,73.55 U$4.GND@0 84.58,71.92 C33.2 | U$3.GND@0 64.7,71.81 64.21,71.32 C31.2 64.21,68.65 64.07,68.51 63.02,68.51 62.86,68.35 61.32,68.35 61.16,68.51 61.1,68.51 Q4.S | Q3.S 61.14,21.09 | 60.74,37.42 60.8,37.42 C6.2 | 54.78,43.39 60.74,37.42 | 49.49,46.13 49.49,46.63 49.81,46.96 50.59,46.96 | 49.49,46.13 49.49,45.75 49.49,44.74 49.49,43.24 U8.5 | 49.49,46.13 | 49.49,46.13 v48.7,46.13 | 51.05,42.73 50.81,42.97 U8.5 | 54.78,43.39 53.98,42.59 52.27,42.59 52.13,42.73 51.47,42.73 51.29,42.73 | 54.78,43.39 54.93,43.54 54.93,43.94 C4.2 | U8.5 50.81,43.5 | 51.05,42.73 51.29,42.73 | U8.4 51.05,42.73 | 51.29,42.73 51.27,42.7 | 48.85,39.78 48.8,39.73 | U8.64 48.85,39.78 | 48.85,39.78 48.85,39.94 48.85,40.6 49.38,40.6 49.74,40.97 | U$3.GND 79.52,71.84 C32.2
  Top 0.762: U$5.GND 83.08,14.75 C36.2 | U$5.GND@0 98.12,14.54 C35.2 | U8.16 U8.15 U8.14 U8.13 | C38.2 92.33,33.76 92.84,33.25 U$6.GND | C37.2 92.38,49.1 92.99,48.49 U$6.GND@0
  Bottom 0.508: RPI-HEADER.6 16.99,72.88 16.99,71.09 19.17,68.91 22.36,68.91 41.7,49.56 41.7,48.68
  Bottom 0.762: U$2.GND@0 78.85,12.91 81.24,12.91 U$5.GND 83.83,15.49 96.49,15.49 U$5.GND@0 101.65,18.08 101.65,27.41 95.81,33.25 94.61,33.25 | Q4.S 56.89,68.51 56.89,65.21 55.17,63.49 Q1.S | 41.7,48.68 42.31,48.68 v42.58,48.4 43.17,47.81 43.17,32.73 45.26,30.65 46.2,30.65 48.24,32.7 GROUND_JUCTION.2 48.24,45.63 48.31,45.7 48.31,46.13 | U$4.GND 102.5,69.93 102.5,57.71 U$6.GND@0 94.61,47.16 94.61,33.25 | 94.61,33.25 U$6.GND | U$4.GND@0 83.63,73.56 81.24,73.56 U$3.GND 78.66,70.97 66,70.97 U$3.GND@0 | 48.31,46.13 48.31,47.88 v47.18,48.89 | v48.7,46.13 48.31,46.13 | PS.7 16.02,13.55 13.82,15.75 POWER-JUMPER.2
  pour Top (isolate 0.254): 5.08,66.04 8.89,66.04 8.89,68.58 11.43,71.12 12.7,71.12 24.13,71.12 36.83,58.42 48.26,58.42 48.26,29.21 36.83,29.21 24.13,16.51 5.08,16.51 5.08,0 105.41,0 105.41,86.36 5.08,86.36
  pour Top (isolate 0.203): 5.08,66.04 8.89,66.04 8.89,68.58 11.43,71.12 12.7,71.12 24.13,71.12 36.83,58.42 48.26,58.42 48.26,29.21 36.83,29.21 24.13,16.51 5.08,16.51 5.08,0 105.41,0 105.41,86.36 5.08,86.36
  pour Bottom (isolate 0.254): 5.08,66.04 8.89,66.04 8.89,68.58 11.43,71.12 12.7,71.12 24.13,71.12 36.83,58.42 48.26,58.42 48.26,29.21 36.83,29.21 24.13,16.51 5.08,16.51 5.08,0 105.41,0 105.41,86.36 5.08,86.36
GPIO1
  Top 0.254: I2C/UART/GPIO1.7 38.98,77.26 37.45,75.73 25.35,75.73 23.77,74.15 RPI-HEADER.12
M1-MOT2
  Bottom 1.27: U$2.2A 72.11,13.84 MOT4.4 MOT4.3
M1-MOT3
  Bottom 1.27: U$2.1A 69.57,13.84 MOT4.6 MOT4.5
M1-MOT4
  Bottom 1.27: U$2.1B 67.03,13.84 MOT4.8 MOT4.7
M2-MOT1
  Bottom 1.27: U$3.2B 67.25,73.19 67.16,73.28 MOT1.2 MOT1.1
M2-MOT2
  Top 1.27: MOT1.4 69.7,73.28 69.78,73.19 U$3.2A
  Bottom 1.27: MOT1.3 MOT1.4
M2-MOT3
  Top 1.27: MOT1.6 72.24,73.28 72.33,73.19 U$3.1A
  Bottom 1.27: MOT1.5 MOT1.6
M2-MOT4
  Bottom 1.27: U$3.1B 74.86,73.14 74.78,73.23 MOT1.8 MOT1.7
M3-MOT1
  Bottom 1.27: MOT2.1 MOT2.2 85.71,74.02 U$4.2B
M3-MOT2
  Bottom 1.27: U$4.2A 88.25,74.02 MOT2.4 MOT2.3
M3-MOT3
  Bottom 1.27: U$4.1A 90.79,74.02 MOT2.6 MOT2.5
M3-MOT4
  Bottom 1.27: U$4.1B 95.09,73.19 MOT2.8 MOT2.7
M4-MOT1
  Bottom 1.27: U$5.2B 93.98,12.95 93.98,11.56 MOT5.2 MOT5.1
M4-MOT2
  Bottom 1.27: 89.85,10.91 89.85,11.35 U$5.2A | 89.85,10.91 MOT5.3 | MOT5.4 89.85,10.91
M4-MOT3
  Bottom 1.27: 87.31,10.91 87.31,11.35 U$5.1A | 87.31,10.91 MOT5.5 | MOT5.6 87.31,10.91
M4-MOT4
  Bottom 1.27: 84.77,10.91 84.77,11.35 U$5.1B | 84.77,10.91 MOT5.7 | MOT5.8 84.77,10.91
M5-MOT1
  Top 1.27: U$6.2B 93.46,46.13 MOT3.2 MOT3.1
M5-MOT2
  Top 1.27: U$6.2A 93.46,43.59 MOT3.4 MOT3.3
M5-MOT3
  Top 1.27: U$6.1A 93.46,41.05 MOT3.6 MOT3.5
M5-MOT4
  Top 1.27: U$6.1B 93.46,38.51 MOT3.8 MOT3.7
MISO  (via drill 0.61 pad 1.12)
  Top 0.254: RPI-HEADER.21 36.25,71.39 R32.2 | U9.14 63.63,36.44 v63.63,35.49 | U8.7 52,44.23 52.5,43.73 v53.45,43.73
  Bottom 0.254: RPI-HEADER.21 36.04,70.96 40.52,66.48 42.42,66.48 43.24,65.67 43.24,61.14 43.16,61.06 43.16,59.2 51.16,51.2 51.16,46.02 v53.45,43.73 59.81,43.73 63.63,39.92 v63.63,35.49
MOSI  (via drill 0.61 pad 1.12)
  Top 0.254: U9.13 62.22,37.13 62.22,36.46 v61.56,35.79 | 55.17,37.51 49.47,31.8 v45.72,31.8 | 55.17,37.51 51.93,40.75 51.93,41.74 U8.2 | v58.69,37.18 55.5,37.18 55.17,37.51 | R33.2 34.17,69.83 33.5,70.51 RPI-HEADER.19
  Bottom 0.254: v61.56,35.79 60.17,37.18 v58.69,37.18 | v45.72,31.8 44.89,32.64 44.89,44.5 46.09,45.71 46.09,53.34 33.5,65.94 RPI-HEADER.19
MOT4
  Top 1.27: MOT4.2 MOT4.1
  Bottom 1.27: MOT4.2 74.65,13.2 75.02,13.56 U$2.2B
N$1  (via drill 0.61 pad 1.12)
  Top 0.254: v33.4,46.12 R11.2 25.85,45.24 C25.1 | v37.88,46.23 38.31,45.79 38.31,45.75 U8.39
  Bottom 0.254: v37.88,46.23 33.5,46.23 v33.4,46.12
N$2
  Top 0.254: ANALOG-INPUTS.8 9.92,46.64 10.02,46.53 ANG3.1 12.74,46.53 12.74,45.71 13.69,44.76 15.96,44.76 16.96,45.77 U4.3
N$3
  Top 0.254: R11.1 21.94,46.12 21.59,45.77 U4.4 19.55,45.77 19.55,47.09 18.99,47.65 U4.1
N$4
  Top 0.254: ANG3.2 14.19,48.33 14.68,48.82 R5.1
N$5
  Top 0.254: Q2.G 45.49,22.39 46.1,23 R18.2
N$6  (via drill 0.61 pad 1.12)
  Top 0.254: v33.33,44.28 29.03,44.28 26.82,42.07 R12.2 25.84,40.94 C26.1 | v40.88,44.82 40.45,44.38 40.45,44.23 U8.42
  Bottom 0.254: v40.88,44.82 40.35,44.28 v33.33,44.28
N$7
  Top 0.254: RPI-HEADER.15 28.42,70.79 40.04,59.16 45.78,59.16 48.35,56.6 48.35,51.77 U8.18
N$8
  Bottom 0.254: JP7.3 75.04,22.66 76.08,23.7 76.08,25.84 U$2.MS2
N$9
  Top 0.254: U9.21 71.8,40.38 72.54,39.64 72.54,36.91 U$5.DIR
N$10
  Top 0.254: R16.1 P-ON.A
N$11
  Bottom 0.254: JP7.1 72.5,22.66 73.54,23.7 73.54,25.84 U$2.MS3
N$12
  Top 0.254: R17.2 50.77,63.78 47.12,67.43 46.11,67.43 Q1.G
N$13
  Top 0.254: ANG4.1 12.88,37.56 12.88,36.78 13.85,35.81 16.05,35.81 17.02,36.78 U5.3
  Bottom 0.254: ANALOG-INPUTS.6 9.87,41.56 9.87,41.29 11.84,39.31 ANG4.1
N$14  (via drill 0.61 pad 1.12)
  Top 0.254: v17.95,62.7 18.24,62.7 18.89,63.35 18.89,63.76 U2.3
  Bottom 0.254: ANG1.1 12.57,64.32 12.57,63.55 13.62,62.51 | ANALOG-INPUTS.12 9.87,56.8 9.87,58.75 13.62,62.51 | 13.62,62.51 17.76,62.51 v17.95,62.7
N$15
  Top 0.254: R9.1 23.96,61.33 21.53,63.76 U2.4 19.5,63.76 19.5,65.08 18.94,65.64 U2.1
N$16
  Top 0.254: U8.33 38.31,48.75 37.44,49.62 37.44,50.04 35.34,52.15 26.95,52.15 26.88,52.21 C23.1 25.85,53.1 25.86,53.11 R9.2
N$17
  Top 0.254: R12.1 22.96,42.07 21.46,40.58 21.46,39.61 21.54,39.53 21.54,36.78 U5.4 19.61,36.78 18.95,37.44 18.95,38.66 U5.1
N$18
  Top 0.254: ANG1.2 14.07,66.12 14.59,66.64 R3.1
N$19
  Top 0.254: ANG4.2 14.38,39.31 14.8,39.74 R6.1
N$20  (via drill 0.61 pad 1.12)
  Top 0.254: U9.18 71.8,38.42 71.8,36.08 71.5,35.78 v67.52,35.78
  Bottom 0.254: v67.52,35.78 65.95,37.36 65.95,39.65 45.59,60 45.59,60.42 43.8,62.22 43.8,67.59 40.96,70.43 38.15,70.43 37.14,71.43 37.14,73.04 RPI-HEADER.22
N$21  (via drill 0.61 pad 1.12)
  Top 0.254: U8.23 45.86,48.37 v45.2,47.71
  Bottom 0.254: RPI-HEADER.13 45.2,52.28 v45.2,47.71
N$22  (via drill 0.61 pad 1.12)
  Top 0.254: U9.19 69.02,39.09 68.15,39.95 68.15,47.75 v68.25,47.84
  Bottom 0.254: RPI-HEADER.18 32.88,76.07 40.94,76.07 47.61,82.75 57.85,82.75 59.12,81.48 59.12,75.06 61.13,73.05 61.13,54.96 v68.25,47.84
N$23  (via drill 0.61 pad 1.12)
  Top 0.254: v33.35,40.45 v33.34,40.45 26.82,33.92 R14.2 25.84,32.79 C28.1 | U8.48 39.32,41.17 v39.32,40.3
  Bottom 0.254: v39.32,40.3 39.17,40.45 v33.35,40.45
N$24  (via drill 0.61 pad 1.12)
  Top 0.254: U8.36 40.58,47.25 v40.95,47.62 | v35.08,51.15 27.79,51.15 26.83,50.18 R10.2 25.85,49.05 C24.1
  Bottom 0.254: v40.95,47.62 40.95,48.9 38.7,51.15 v35.08,51.15
N$25
  Bottom 0.254: JP12.5 97.86,22.8 98.92,23.85 98.92,25.77 U$5.MS1
N$26
  Top 0.254: Q3.G 59.03,17.1 58.14,17.1 56.39,18.85 56.39,19.44 54.59,21.23 54.2,21.23 53.31,22.13 53.31,23.63 R19.2
N$27
  Bottom 0.254: JP10.5 84.67,48.37 83.62,49.41 81.5,49.41 U$6.MS1
N$28
  Bottom 0.254: JP9.5 84.89,63.59 83.83,62.53 83.83,60.66 U$4.MS1
N$29  (via drill 0.61 pad 1.12)
  Top 0.254: v73.29,60.67 72.97,61 72.97,61.12 R22.1 | JP8.2 JP8.4 JP8.6
  Bottom 0.254: v73.29,60.67 72.88,60.67 71.15,62.4 JP8.2
N$30
  Top 0.254: JP7.6 JP7.4 JP7.2 71.41,24.16 71.41,24.15 R21.1
N$31
  Bottom 0.254: JP12.3 95.33,22.8 96.37,23.84 96.37,25.78 U$5.MS2
N$32
  Bottom 0.254: JP12.1 92.78,22.8 93.83,23.84 93.83,25.78 U$5.MS3
N$33
  Top 0.254: U$5.STEP 73.21,38.77 73.21,39.68 71.85,41.04 U9.22
N$34  (via drill 0.61 pad 1.12)
  Top 0.254: v54.52,59.44 54.17,59.8 R20.1 | v62.22,45.93 62.22,44.29 U9.2
  Bottom 0.254: v62.22,45.93 62.22,51.74 v54.52,59.44
N$35
  Top 0.254: U$2.SLP U$2.RST
N$36  (via drill 0.61 pad 1.12)
  Top 0.254: v69.08,45.91 69.08,39.75 U9.20
  Bottom 0.254: v69.08,45.91 69.19,46.02 69.19,48.49 63.51,54.17 63.51,76.42 59.57,80.36 59.57,81.7 57.99,83.28 45.96,83.28 39.2,76.53 31.32,76.53 28.94,74.15 RPI-HEADER.16
N$37  (via drill 0.61 pad 1.12)
  Top 0.254: v51.69,59.42 51.24,59.87 50.77,59.87 R17.1 | U9.3 62.17,43.63 60.72,45.08 v60.72,47.16
  Bottom 0.254: v60.72,47.16 60.72,50.38 v51.69,59.42
N$38  (via drill 0.61 pad 1.12)
  Top 0.254: v50.59,26.33 50.14,25.88 50.03,25.88 R18.1 | U9.5 60.41,42.34 v60.16,42.09
  Bottom 0.254: v60.16,42.09 50.59,32.52 v50.59,26.33
N$39
  Bottom 0.254: JP8.5 65.03,63.9 63.97,62.85 63.97,60.3 U$3.MS1
N$40  (via drill 0.61 pad 1.12)
  Top 0.254: U8.28 43.34,52.05 43.8,52.51 43.8,56.04 43.58,56.26 39.35,56.26 39.09,56.01 33.79,56.01 v32.97,56.83
  Bottom 0.254: RPI-HEADER.7 18.26,72.43 17.05,73.64 17.05,74.5 16.2,75.35 12.84,75.35 12.06,74.56 12.06,73.69 13.05,72.69 13.7,72.69 14.45,71.94 14.45,71.3 21.61,64.13 25.67,64.13 v32.97,56.83
N$41
  Bottom 0.254: JP8.3 67.56,63.9 66.47,62.81 66.47,60.34 U$3.MS2
N$42
  Bottom 0.254: JP8.1 70.11,63.9 69.01,62.81 69.01,60.34 U$3.MS3
N$43
  Bottom 0.254: JP9.3 87.42,63.59 86.38,62.55 86.38,60.65 U$4.MS2
N$44
  Top 0.254: U$6.DIR 72.15,41.68 U9.23
N$45
  Top 0.254: U9.24 74.03,42.34 U$6.STEP
N$46
  Top 0.254: U$3.SLP U$3.RST
N$47
  Top 0.254: Q4.G 57.09,63.43 56.41,62.76 R20.2
N$48
  Bottom 0.254: JP9.1 89.97,63.59 88.92,62.55 88.92,60.65 U$4.MS3
N$49
  Top 0.254: JP10.3 84.67,45.83 83.61,46.88 81.51,46.88 U$6.MS2
N$50
  Top 0.254: JP10.1 84.67,43.29 83.61,44.34 81.51,44.34 U$6.MS3
N$51
  Bottom 0.254: JP7.5 77.58,22.66 78.64,23.71 78.64,25.82 U$2.MS1
N$52
  Top 0.254: LED2.A 45.42,74.92 45.38,74.89 R1.1
N$53
  Top 0.254: LED5.A 46.17,10.35 46.14,10.35 46.1,10.39 R27.1
N$54
  Top 0.254: JP9.6 JP9.4 JP9.2 91.06,62.09 91.07,62.1 R23.1
N$55
  Top 0.254: JP13.2 7.26,70.46 9.54,72.74 10.88,72.74 11.97,73.82 11.97,76.42 15.62,80.08 R30.2 17.88,80.08 18.84,79.13 18.84,78.25 R29.2
N$56
  Top 0.254: LED3.A 57.79,10.6 57.86,10.6 57.88,10.62 R15.1
N$57
  Top 0.254: U9.25 71.8,43 76.61,43 80,39.6 82.79,39.6 90.19,32.2 93.73,32.2 94.32,32.8 94.32,36.21 93.64,36.9 93.2,36.9 89.59,40.51 89.59,51.95 91.16,53.52 94.13,53.52 U$4.DIR
N$58
  Top 0.254: U9.26 71.8,43.63 71.85,43.58 73,43.58 79.18,49.76 86.75,49.76 96.55,59.56 U$4.STEP
N$59
  Top 0.254: U$4.SLP U$4.RST
N$60
  Top 0.254: I2C/UART/GPIO1.6 36.44,77.26 35.93,76.75 25.62,76.75 24.1,75.23 21.88,75.23 RPI-HEADER.10
N$61
  Top 0.254: LED4.A 57.96,75.12 57.88,75.12 57.69,74.93 R26.1
N$62
  Top 0.254: I2C/UART/GPIO1.5 33.9,77.26 23.58,77.26 22.29,75.96 20.07,75.96 RPI-HEADER.8
N$63
  Bottom 0.254: RPI-HEADER.2 12.37,75.88 29.98,75.88 31.36,77.26 I2C/UART/GPIO1.4
N$64
  Top 0.254: R30.1 16.75,77.15 14.39,74.78 14.39,72.82 RPI-HEADER.3
N$65
  Top 0.254: 21.85,78.26 R29.1 | I2C/UART/GPIO1.1 23.09,78.26 21.85,78.26 | 21.85,78.26 | RPI-HEADER.5 17.05,72.94 17.05,74.54 18.93,76.42 20.02,76.42 21.85,78.26
N$67
  Top 0.254: JP12.6 JP12.4 JP12.2 91.69,24.3 91.5,24.11 R24.1
N$70  (via drill 0.61 pad 1.12)
  Top 0.254: U9.27 72.45,44.29 v72.62,44.47
  Bottom 0.254: v72.62,44.47 78.44,50.28 78.44,58.06 U$3.DIR
N$71  (via drill 0.61 pad 1.12)
  Top 0.254: v71.99,45.73 71.8,45.55 71.8,44.93 U9.28
  Bottom 0.254: U$3.STEP 71.99,54.14 v71.99,45.73
N$72
  Top 0.254: U$5.SLP U$5.RST
N$73  (via drill 0.61 pad 1.12)
  Top 0.254: v17.01,53.8 16.98,53.83 16.98,54.84 U3.3
  Bottom 0.254: v17.01,53.8 16.86,53.65 13.54,53.65 12.57,54.62 12.57,55.4 ANG2.1 10.48,55.4 9.87,54.78 9.87,51.72 ANALOG-INPUTS.10
N$77
  Top 0.254: JP14.1 39.64,67.75 39.46,67.57 39.46,66.9 R31.1 37.2,66.9 37.19,66.89 R32.1 35.12,66.89 35.11,66.9 R33.1
N$80
  Top 0.254: U3.1 18.96,56.72 19.52,56.16 19.52,54.84 U3.4 21.55,54.84 21.55,51.55 22.92,50.18 R10.1
N$82
  Top 0.254: ANG2.2 14.07,57.2 14.58,57.72 R4.1
N$84  (via drill 0.61 pad 1.12)
  Top 0.254: v65.47,42.47 64.94,41.94 64.94,41.68 U9.6 | v60.74,23.95 55.53,23.95 R19.1
  Bottom 0.254: v60.74,23.95 60.89,23.95 63.82,26.88 63.82,30.82 68.41,35.41 68.41,39.52 v65.47,42.47
N$85
  Top 0.254: U8.45 31.55,42.73 26.82,38 R13.2 25.84,37.1 25.83,37.1 C27.1
N$86  (via drill 0.61 pad 1.12)
  Top 0.254: U6.3 17.92,28.24 v17.92,27.26
  Bottom 0.254: ANALOG-INPUTS.4 9.87,36.48 11.69,34.66 ANG5.1 12.73,29.01 12.73,28.23 13.76,27.2 17.86,27.2 v17.92,27.26
N$87  (via drill 0.61 pad 1.12)
  Top 0.254: U9.7 61.37,41.04 v61.31,40.98
  Bottom 0.254: v61.31,40.98 62.48,39.82 62.48,27.07 U$2.DIR
N$88  (via drill 0.61 pad 1.12)
  Top 0.254: v66.83,42.38 66.83,42.27 64.94,40.38 U9.8
  Bottom 0.254: U$2.STEP 68.89,30.95 68.89,40.31 v66.83,42.38
N$89
  Top 0.254: JP10.2 83.17,42.2 83.29,42.08 R25.1
  Bottom 0.254: JP10.2 JP10.4 JP10.6
N$94
  Bottom 0.254: U$6.SLP U$6.RST
N$95
  Top 0.254: R13.1 22.96,38 22.96,37.32 21.51,35.87 21.51,34.47 21.92,34.05 21.92,31.87 21.55,31.5 21.55,28.31 U6.4 19.62,28.31 18.96,28.97 18.96,30.19 U6.1
N$96
  Top 0.254: ANG5.2 14.23,30.76 14.35,30.88 R7.1
N$104
  Top 0.254: ANG6.1 12.59,20.01 12.59,19.23 13.58,18.25 16.22,18.25 17.03,19.06 U7.3
  Bottom 0.254: ANG6.1 10.51,20.01 9.87,20.66 9.87,31.4 ANALOG-INPUTS.2
N$106  (via drill 0.61 pad 1.12)
  Top 0.254: 20.47,19.43 v21.98,20.94 | 20.47,19.43 20.1,19.06 U7.4 | 20.47,19.43 18.96,20.94 U7.1 | R14.1 22.96,33.92 22.61,33.58 v22.61,30.72
  Bottom 0.254: v22.61,30.72 21.98,30.09 v21.98,20.94
N$107
  Top 0.254: ANG6.2 14.09,21.77 14.41,22.08 R8.1
N$109
  Top 0.254: RPI-HEADER.11 36.55,58.4 39.49,58.4 39.64,58.25 45.33,58.25 47.13,56.45 47.13,53.08 45.82,51.77 45.35,51.77 U8.24
POK  (via drill 0.61 pad 1.12)
  Top 0.254: R16.2 31.18,11.82 30.74,12.26 v29.98,12.26
  Bottom 0.254: PS.3 29.98,6.57 v29.98,12.26
PON
  Top 0.254: POWER-JUMPER.1 13.7,12.16 13.88,12.16 PS.6
PWM1  (via drill 0.61 pad 1.12)
  Top 1.2: 48.27,8.23 48.27,8.01 49.35,8.01 49.61,7.76 | LED5.C 48.27,8.72
  Top 1.7: 49.61,7.76 52.53,4.83
  Top 2.54: v46.44,7.28 47.31,7.28 48.27,8.23 48.27,8.72 | PWM3.1 52.53,4.83
  Bottom 2.54: D4.A 49.21,18.76 48.48,18.76 | v46.44,7.28 46.44,11.19 48.48,13.23 48.48,18.76 | Q2.D 48.48,18.76
PWM2
  Top 1.7: LED2.C 47.52,80.13
  Top 2.54: PWM1.1 48.52,81.14 47.52,80.13
  Bottom 2.54: 49.11,66.03 50.68,66.03 D1.A | Q1.D 49.11,66.03 | PWM1.1 48.74,70.35 49.11,69.98 49.11,66.03
PWM3
  Top 1.7: LED3.C 59.89,5.96
  Top 2.54: PWM4.1 61.22,4.63 59.89,5.96
  Bottom 2.54: 56.03,18.55 55.53,18.55 D2.A | Q3.D 56.03,18.55 | PWM4.1 61.43,8.64 56.03,14.04 56.03,18.55
PWM4
  Top 1.2: 60.09,76.49 60.09,76.07 LED4.C
  Top 2.54: PWM2.1 57.25,80.63 60.09,77.8 60.09,76.49 | Q4.D 55,65.97 D3.A
  Bottom 2.54: PWM2.1 57.25,73.11 54.48,70.34 D3.A
REFC_A
  Top 0.254: U8.54 43.85,38.29 42.66,37.1 42.46,37.1 C10.1
REFC_B
  Top 0.254: U8.56 44.84,38.16 44.84,37.42 44.52,37.1 C15.1
REFC_C
  Top 0.254: C18.1 46.58,37.15 45.86,37.87 U8.58
REFIO
  Top 0.254: U8.51 42.35,38.07 41.43,37.15 40.41,37.15 C3.1

## Text on the board
tNames: ANALOG INPUTS
nombres_prod: MOT2 | SCL | SDA | +3.3V | +5V | TX | RX | GPIO1 | MOT1 | RASPBERRY PI HEADER | Pull-Up I2C | Pull-Up SPI | ANG1 | PWM 1-2 | RODOLFO BORIS OPORTO QUISBERT | ANG2 | rboporto@gmail.com | ANG3 | MOT3 | ANG4 | BUPT 2014 | PWM 3-4 | ANG5 | OSHW | ANG6 | POWER-JUMPER | MOT4 | MOT5 | GND | PON | +5V | -12V | POK | +3V | +12V